# EAGLE board fmc (EAGLE 7.5.0)
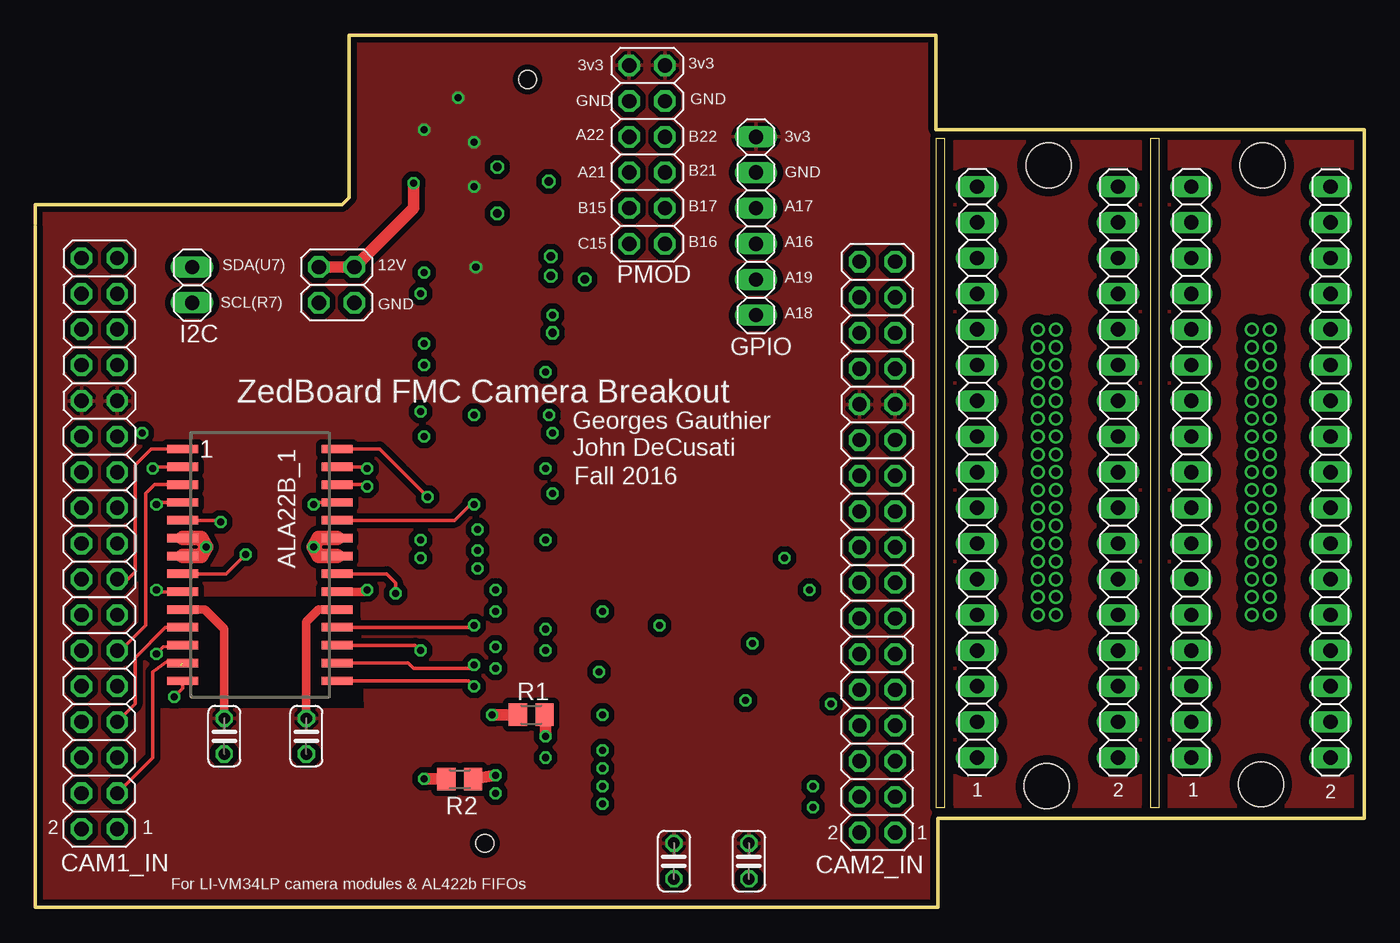
[diagram p0: board, top side]
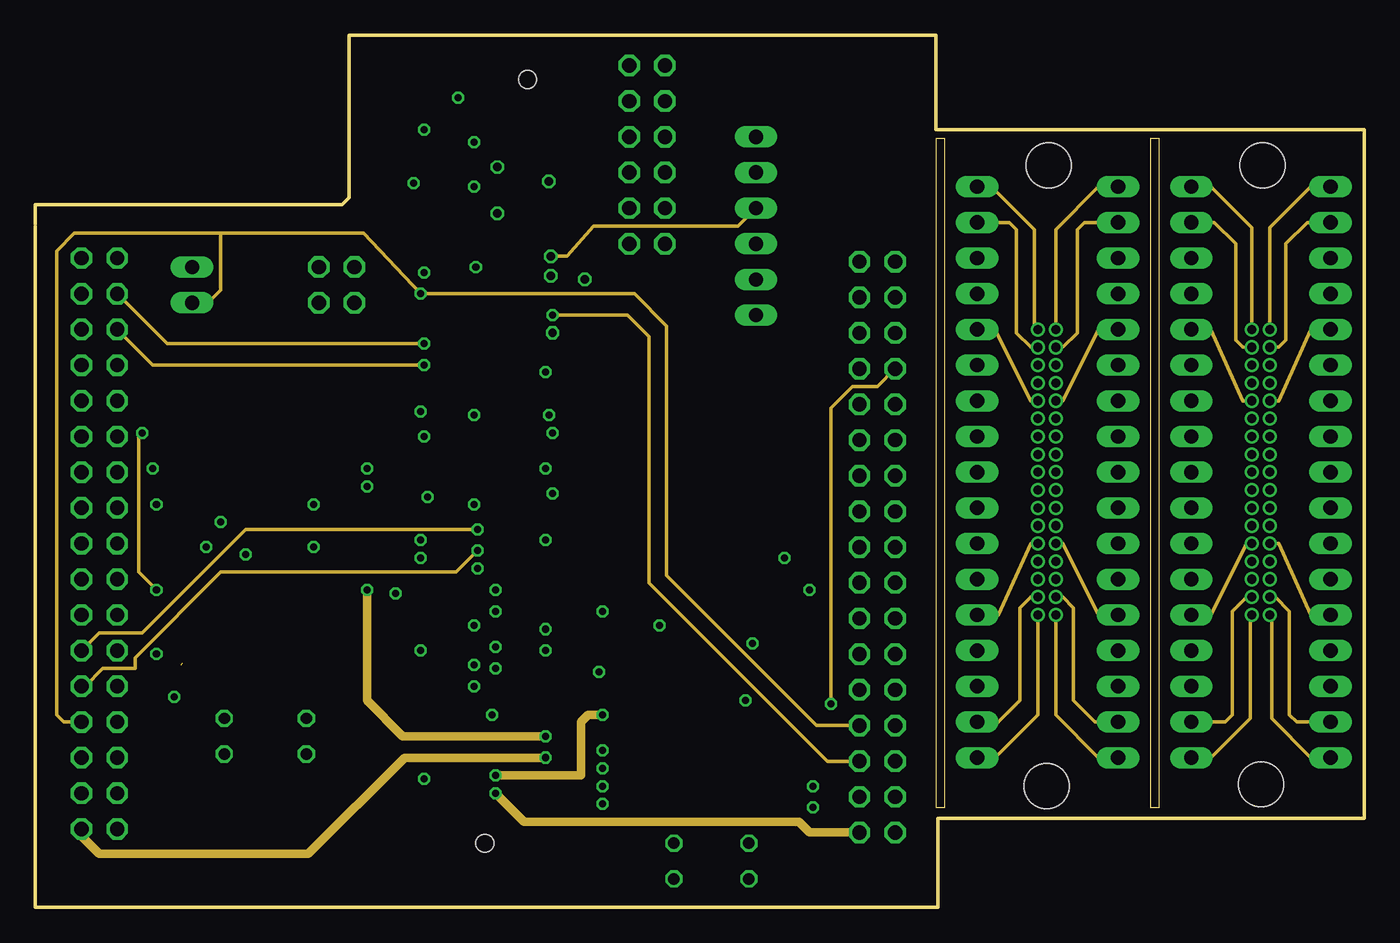
[diagram p1: board, inner layer Route2]
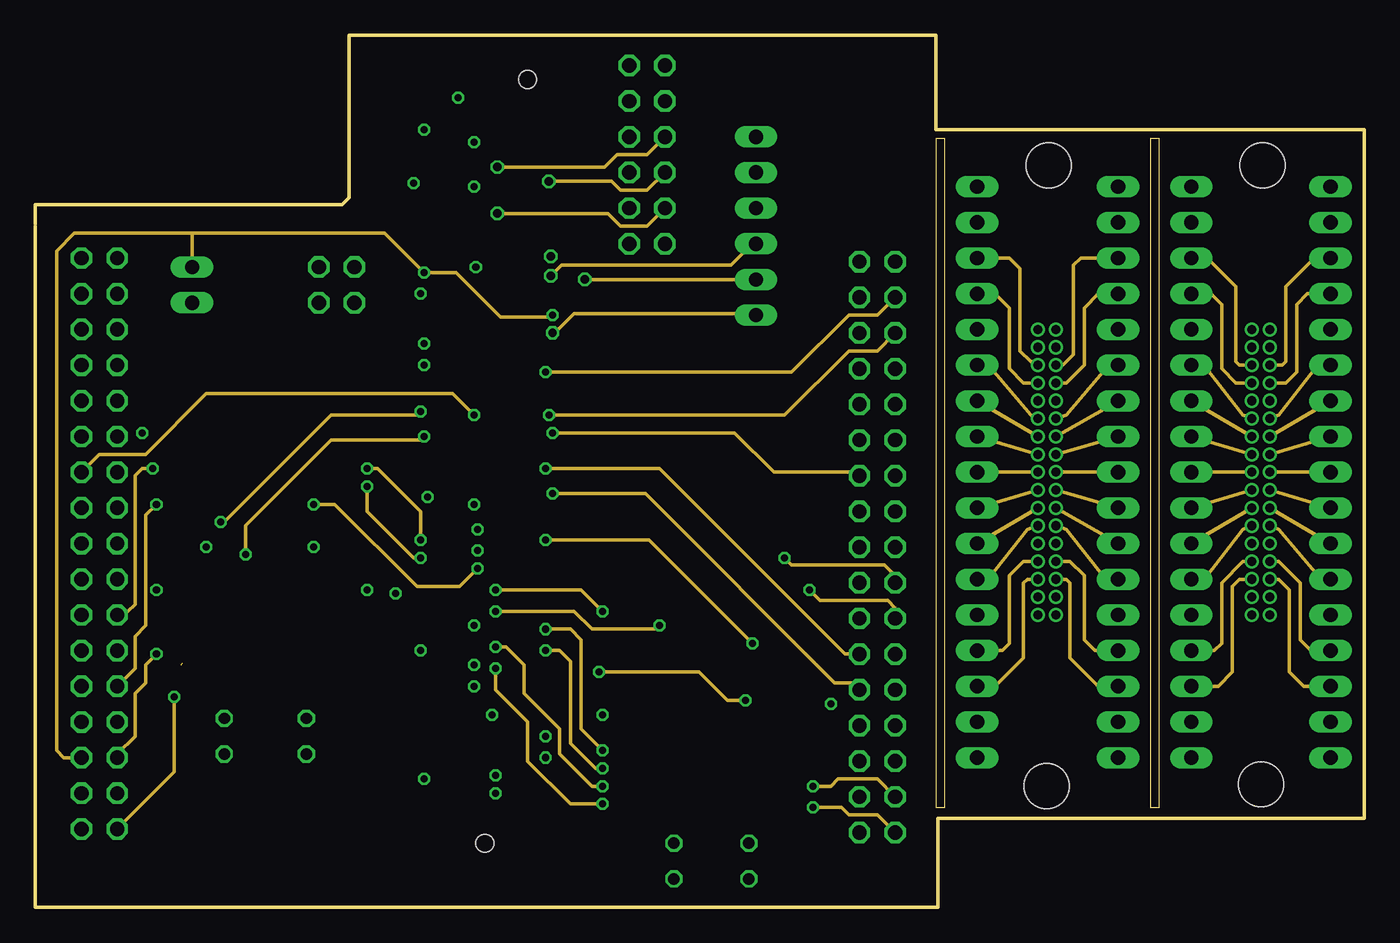
[diagram p2: board, inner layer Route15]
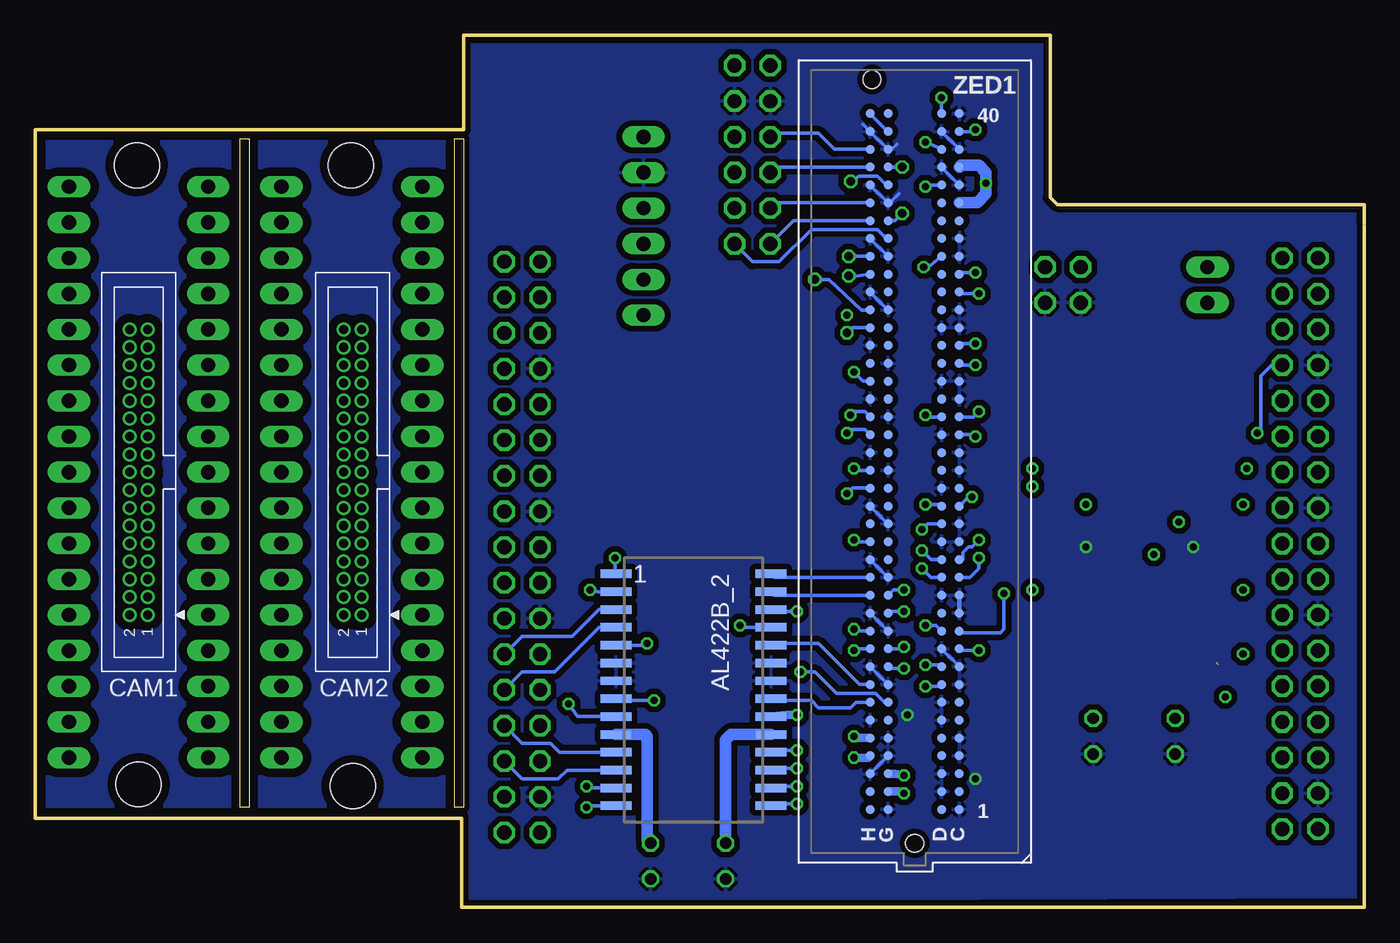
[diagram p3: board, bottom side, seen from below]

Size 94.61 x 62.1 mm. Coordinates in mm from the lower left corner, seen from the top.
Outline: 0,48.51 0,0 64.26,0 64.26,6.35 94.61,6.35 94.61,55.37 64.14,55.37 64.14,62.1 22.35,62.1 22.35,50.55 21.84,50.04 0,50.04 0,48.64
Copper layers (1*2+15*16): Top 0.0356mm / dielectric 1.5011mm / Route2 0.0356mm / dielectric 0.1499mm / Route15 0.0356mm / dielectric 0.2007mm / Bottom 0.0356mm
Design rules "OSHpark *": minimum track width 6mil, minimum drill 13mil, track to track 6mil, track to pad 6mil, pad to pad 6mil, via to via 6mil, smd to smd 6mil, copper to edge 15mil, drill to drill 6mil, minimum pad ring 7mil, minimum via ring 7mil, stop-mask expansion 3mil, vias tented up to drill 0mil, thermal gap 10mil
Holes 3.2 mm at 87.25,8.76 72.14,52.83 72.01,8.64 87.38,52.83

## Footprints (pad centres in the part's own frame; a part is rotated, then mirrored left to right if it is on the bottom)
SOP28 = smd 0.6 x 2.2: 1 -8.255,-5.5; 2 -6.985,-5.5; 3 -5.715,-5.5; 4 -4.445,-5.5; 5 -3.175,-5.5; 6 -1.905,-5.5; 7 -0.635,-5.5; 8 0.635,-5.5; 9 1.905,-5.5; 10 3.175,-5.5; 11 4.445,-5.5; 12 5.715,-5.5; 13 6.985,-5.5; 14 8.255,-5.5; 15 8.255,5.5; 16 6.985,5.5; 17 5.715,5.5; 18 4.445,5.5; 19 3.175,5.5; 20 1.905,5.5; 21 0.635,5.5; 22 -0.635,5.5; 23 -1.905,5.5; 24 -3.175,5.5; 25 -4.445,5.5; 26 -5.715,5.5; 27 -6.985,5.5; 28 -8.255,5.5
C025-024X044 = drill 0.813 octagon: 1 -1.27,0; 2 1.27,0
PHB_1MM27_2X17_SNT = drill 0.65: 1 -10.16,-0.635; 2 -10.16,0.635; 3 -8.89,-0.635; 4 -8.89,0.635; 5 -7.62,-0.635; 6 -7.62,0.635; 7 -6.35,-0.635; 8 -6.35,0.635; 9 -5.08,-0.635; 10 -5.08,0.635; 11 -3.81,-0.635; 12 -3.81,0.635; 13 -2.54,-0.635; 14 -2.54,0.635; 15 -1.27,-0.635; 16 -1.27,0.635; 17 0,-0.635; 18 0,0.635; 19 1.27,-0.635; 20 1.27,0.635; 21 2.54,-0.635; 22 2.54,0.635; 23 3.81,-0.635; 24 3.81,0.635; 25 5.08,-0.635; 26 5.08,0.635; 27 6.35,-0.635; 28 6.35,0.635; 29 7.62,-0.635; 30 7.62,0.635; 31 8.89,-0.635; 32 8.89,0.635; 33 10.16,-0.635; 34 10.16,0.635
2X17 = drill 1.016 octagon: 1 -20.32,-1.27; 2 -20.32,1.27; 3 -17.78,-1.27; 4 -17.78,1.27; 5 -15.24,-1.27; 6 -15.24,1.27; 7 -12.7,-1.27; 8 -12.7,1.27; 9 -10.16,-1.27; 10 -10.16,1.27; 11 -7.62,-1.27; 12 -7.62,1.27; 13 -5.08,-1.27; 14 -5.08,1.27; 15 -2.54,-1.27; 16 -2.54,1.27; 17 0,-1.27; 18 0,1.27; 19 2.54,-1.27; 20 2.54,1.27; 21 5.08,-1.27; 22 5.08,1.27; 23 7.62,-1.27; 24 7.62,1.27; 25 10.16,-1.27; 26 10.16,1.27; 27 12.7,-1.27; 28 12.7,1.27; 29 15.24,-1.27; 30 15.24,1.27; 31 17.78,-1.27; 32 17.78,1.27; 33 20.32,-1.27; 34 20.32,1.27
1X06 = drill 1.016 long: 1 -6.35,0; 2 -3.81,0; 3 -1.27,0; 4 1.27,0; 5 3.81,0; 6 6.35,0
1X02 = drill 1.016 long: 1 -1.27,0; 2 1.27,0
1X17 = drill 1.016 long: 1 -20.32,0; 2 -17.78,0; 3 -15.24,0; 4 -12.7,0; 5 -10.16,0; 6 -7.62,0; 7 -5.08,0; 8 -2.54,0; 9 0,0; 10 2.54,0; 11 5.08,0; 12 7.62,0; 13 10.16,0; 14 12.7,0; 15 15.24,0; 16 17.78,0; 17 20.32,0
2X06 = drill 1.016 octagon: 1 -6.35,-1.27; 2 -6.35,1.27; 3 -3.81,-1.27; 4 -3.81,1.27; 5 -1.27,-1.27; 6 -1.27,1.27; 7 1.27,-1.27; 8 1.27,1.27; 9 3.81,-1.27; 10 3.81,1.27; 11 6.35,-1.27; 12 6.35,1.27
2X02 = drill 1.016 octagon: 1 -1.27,-1.27; 2 -1.27,1.27; 3 1.27,-1.27; 4 1.27,1.27
M0805 = smd 1.3 x 1.6: 1 -0.95,0; 2 0.95,0
ASP-134604-01 = smd 0.635 x 0.635: C1 24.765,3.175; C2 23.495,3.175; C3 22.225,3.175; C4 20.955,3.175; C5 19.685,3.175; C6 18.415,3.175; C7 17.145,3.175; C8 15.875,3.175; C9 14.605,3.175; C10 13.335,3.175; C11 12.065,3.175; C12 10.795,3.175; C13 9.525,3.175; C14 8.255,3.175; C15 6.985,3.175; C16 5.715,3.175; C17 4.445,3.175; C18 3.175,3.175; C19 1.905,3.175; C20 0.635,3.175; C21 -0.635,3.175; C22 -1.905,3.175; C23 -3.175,3.175; C24 -4.445,3.175; C25 -5.715,3.175; C26 -6.985,3.175; C27 -8.255,3.175; C28 -9.525,3.175; C29 -10.795,3.175; C30 -12.065,3.175; C31 -13.335,3.175; C32 -14.605,3.175; C33 -15.875,3.175; C34 -17.145,3.175; C35 -18.415,3.175; C36 -19.685,3.175; C37 -20.955,3.175; C38 -22.225,3.175; C39 -23.495,3.175; C40 -24.765,3.175; D1 24.765,1.905; D2 23.495,1.905; D3 22.225,1.905; D4 20.955,1.905; D5 19.685,1.905; D6 18.415,1.905; D7 17.145,1.905; D8 15.875,1.905; D9 14.605,1.905; D10 13.335,1.905; D11 12.065,1.905; D12 10.795,1.905; D13 9.525,1.905; D14 8.255,1.905; D15 6.985,1.905; D16 5.715,1.905; D17 4.445,1.905; D18 3.175,1.905; D19 1.905,1.905; D20 0.635,1.905; D21 -0.635,1.905; D22 -1.905,1.905; D23 -3.175,1.905; D24 -4.445,1.905; D25 -5.715,1.905; D26 -6.985,1.905; D27 -8.255,1.905; D28 -9.525,1.905; D29 -10.795,1.905; D30 -12.065,1.905; D31 -13.335,1.905; D32 -14.605,1.905; D33 -15.875,1.905; D34 -17.145,1.905; D35 -18.415,1.905; D36 -19.685,1.905; D37 -20.955,1.905; D38 -22.225,1.905; D39 -23.495,1.905; D40 -24.765,1.905; G1 24.765,-1.905; G2 23.495,-1.905; G3 22.225,-1.905; G4 20.955,-1.905; G5 19.685,-1.905; G6 18.415,-1.905; G7 17.145,-1.905; G8 15.875,-1.905; G9 14.605,-1.905; G10 13.335,-1.905; G11 12.065,-1.905; G12 10.795,-1.905; G13 9.525,-1.905; G14 8.255,-1.905; G15 6.985,-1.905; G16 5.715,-1.905; G17 4.445,-1.905; G18 3.175,-1.905; G19 1.905,-1.905; G20 0.635,-1.905; G21 -0.635,-1.905; G22 -1.905,-1.905; G23 -3.175,-1.905; G24 -4.445,-1.905; G25 -5.715,-1.905; G26 -6.985,-1.905; G27 -8.255,-1.905; G28 -9.525,-1.905; G29 -10.795,-1.905; G30 -12.065,-1.905; G31 -13.335,-1.905; G32 -14.605,-1.905; G33 -15.875,-1.905; G34 -17.145,-1.905; G35 -18.415,-1.905; G36 -19.685,-1.905; G37 -20.955,-1.905; G38 -22.225,-1.905; G39 -23.495,-1.905; G40 -24.765,-1.905; H1 24.765,-3.175; H2 23.495,-3.175; H3 22.225,-3.175; H4 20.955,-3.175; H5 19.685,-3.175; H6 18.415,-3.175; H7 17.145,-3.175; H8 15.875,-3.175; H9 14.605,-3.175; H10 13.335,-3.175; H11 12.065,-3.175; H12 10.795,-3.175; H13 9.525,-3.175; H14 8.255,-3.175; H15 6.985,-3.175; H16 5.715,-3.175; H17 4.445,-3.175; H18 3.175,-3.175; H19 1.905,-3.175; H20 0.635,-3.175; H21 -0.635,-3.175; H22 -1.905,-3.175; H23 -3.175,-3.175; H24 -4.445,-3.175; H25 -5.715,-3.175; H26 -6.985,-3.175; H27 -8.255,-3.175; H28 -9.525,-3.175; H29 -10.795,-3.175; H30 -12.065,-3.175; H31 -13.335,-3.175; H32 -14.605,-3.175; H33 -15.875,-3.175; H34 -17.145,-3.175; H35 -18.415,-3.175; H36 -19.685,-3.175; H37 -20.955,-3.175; H38 -22.225,-3.175; H39 -23.495,-3.175; H40 -24.765,-3.175 | hole 1.27: 27.191,0; -27.191,-3.048

## Placement (x,y rotation side)
AL422B_2  CAM2_FIFO  [SOP28]  47.75,15.49 270 bottom
ALA22B_1  CAM1_FIFO  [SOP28]  16,24.38 270 top
C1  100nf  [C025-024X044]  19.3,12.19 270 top
C2  100nf  [C025-024X044]  13.46,12.19 270 top
C3  100nf  [C025-024X044]  45.47,3.3 270 top
C4  100nf  [C025-024X044]  50.8,3.3 270 top
CAM1  [PHB_1MM27_2X17_SNT]  87.25,30.99 90 bottom
CAM1_IN  [2X17]  4.57,25.91 90 top
CAM2  [PHB_1MM27_2X17_SNT]  72.01,30.99 90 bottom
CAM2_IN  [2X17]  59.94,25.65 90 top
GPIO  [1X06]  51.31,48.51 90 top
I2C  [1X02]  11.18,44.32 90 top
JP1  [1X17]  82.3,30.99 270 top
JP2  [1X17]  92.2,30.99 90 top
JP3  [1X17]  77.09,30.99 90 top
JP4  [1X17]  67.06,30.99 270 top
PMOD  [2X06]  43.56,53.59 270 top
PWR  PWR  [2X02]  21.46,44.32 270 top
R1  [M0805]  35.31,13.72 180 top
R2  [M0805]  30.23,9.14 180 top
ZED1  ZED-BOARD  [ASP-134604-01]  32,31.75 270 bottom

## Library data of the parts
AL422B_2 ALA22B_1 = AL422B
C1-C4 = rcl
CAM1 CAM2 = _hhn_con_pinhead_box_1mm27
CAM1_IN CAM2_IN GPIO I2C JP1-JP4 PMOD PWR = pinhead
R1 R2 = resistor
ZED1 = zed-board

## Nets
3V3: AL422B_2.10 AL422B_2.19 ALA22B_1.10 ALA22B_1.19 C1.1 C2.1 C3.1 C4.1 CAM1_IN.25 CAM1_IN.26 CAM2_IN.25 CAM2_IN.26 GPIO.6 PMOD.1 PMOD.2 ZED1.C39 ZED1.D32 ZED1.D36 ZED1.D38 ZED1.D40
12V: PWR.1 PWR.2 ZED1.C35 ZED1.C37
A16: GPIO.3 ZED1.H31
A17: GPIO.4 ZED1.H32
A18: GPIO.1 ZED1.H28
A19: GPIO.2 ZED1.H29
A21: PMOD.7 ZED1.H37
A22: PMOD.5 ZED1.H38
B15: PMOD.9 ZED1.H35
B16: PMOD.12 ZED1.G33
B17: PMOD.10 ZED1.G34
B19: ZED1.D20
B20: ZED1.D21
B21: PMOD.8 ZED1.G36
B22: PMOD.6 ZED1.G37
C1D2: ALA22B_1.1 CAM1_IN.15
C1D3: ALA22B_1.2 CAM1_IN.13
C1D4: ALA22B_1.3 CAM1_IN.11
C1D5: ALA22B_1.4 CAM1_IN.9
C1D6: ALA22B_1.11 CAM1_IN.7
C1D7: ALA22B_1.12 CAM1_IN.5
C1D8: ALA22B_1.13 CAM1_IN.3
C1D9: ALA22B_1.14 CAM1_IN.1
C2D2: AL422B_2.1 CAM2_IN.15
C2D3: AL422B_2.2 CAM2_IN.13
C2D4: AL422B_2.3 CAM2_IN.11
C2D5: AL422B_2.4 CAM2_IN.9
C2D6: AL422B_2.11 CAM2_IN.7
C2D7: AL422B_2.12 CAM2_IN.5
C2D8: AL422B_2.13 CAM2_IN.3
C2D9: AL422B_2.14 CAM2_IN.1
C15: PMOD.11 ZED1.H34
C17: ZED1.G30
C18: ZED1.G31
C20: ALA22B_1.5 ZED1.C23
C22: ZED1.G28
CLK0_N(L19): ALA22B_1.20 R1.1 ZED1.H5
CLK0_P(L18): CAM1_IN.2 ZED1.H4
CLK1_N(C19): AL422B_2.20 R2.1 ZED1.G3
CLK1_P(D18): CAM2_IN.2 ZED1.G2
D15: ZED1.D24
D20: ALA22B_1.8 ZED1.C22
D21: CAM1_IN.31 ZED1.C27
D22: ZED1.G27
DP0-C2M_N: ZED1.C3
DP0-C2M_P: ZED1.C2
DP0-M2C_N: ZED1.C7
DP0-M2C_P: ZED1.C6
E15: CAM1_IN.22 ZED1.D23
E18: ZED1.D27
E19: CAM2_IN.31 ZED1.H25
E20: ZED1.H26
E21: CAM1_IN.29 ZED1.C26
F18: ZED1.D26
F19: ZED1.G25
FMC-PRSNT(AB14): ZED1.H2
FMC-VREF: ZED1.H1
G15: CAM2_IN.22 ZED1.H22
G16: CAM2_IN.29 ZED1.H23
G19: ZED1.G24
G20: ZED1.G21
G21: ZED1.G22
GA0: ZED1.C34
GA1: ZED1.D35
GBTCLK0-M2C_N: ZED1.D5
GBTCLK0-M2C_P: ZED1.D4
GND: AL422B_2.6 AL422B_2.7 AL422B_2.22 AL422B_2.23 ALA22B_1.6 ALA22B_1.7 ALA22B_1.22 ALA22B_1.23 C1.2 C2.2 C3.2 C4.2 CAM1_IN.4 CAM1_IN.14 CAM1_IN.20 CAM1_IN.28 CAM2_IN.4 CAM2_IN.14 CAM2_IN.20 CAM2_IN.28 GPIO.5 PMOD.3 PMOD.4 PWR.3 PWR.4 R1.2 R2.2 ZED1.C1 ZED1.C4 ZED1.C5 ZED1.C8 ZED1.C9 ZED1.C12 ZED1.C13 ZED1.C16 ZED1.C17 ZED1.C20 ZED1.C21 ZED1.C24 ZED1.C25 ZED1.C28 ZED1.C29 ZED1.C32 ZED1.C33 ZED1.C36 ZED1.C38 ZED1.C40 ZED1.D2 ZED1.D3 ZED1.D6 ZED1.D7 ZED1.D10 ZED1.D13 ZED1.D16 ZED1.D19 ZED1.D22 ZED1.D25 ZED1.D28 ZED1.D37 ZED1.D39 ZED1.G1 ZED1.G4 ZED1.G5 ZED1.G8 ZED1.G11 ZED1.G14 ZED1.G17 ZED1.G20 ZED1.G23 ZED1.G26 ZED1.G29 ZED1.G32 ZED1.G35 ZED1.G38 ZED1.H3 ZED1.H6 ZED1.H9 ZED1.H12 ZED1.H15 ZED1.H18 ZED1.H21 ZED1.H24 ZED1.H27 ZED1.H30 ZED1.H33 ZED1.H36 ZED1.H39
J16: CAM2_IN.10 ZED1.H19
J17: CAM2_IN.12 ZED1.H20
J18: ALA22B_1.18 ZED1.D11
J20: ZED1.G18
J21: AL422B_2.25 ZED1.G12
J22: AL422B_2.26 ZED1.G13
K18: ZED1.D12
K19: ALA22B_1.28 ZED1.C18
K20: ZED1.C19
K21: ZED1.G19
L17: CAM1_IN.12 ZED1.D17
L21: ALA22B_1.17 ZED1.C10
L22: ALA22B_1.21 ZED1.C11
M17: ALA22B_1.24 ZED1.D18
M19: ZED1.G6
M20: AL422B_2.8 ZED1.G7
M21: AL422B_2.17 ZED1.H10
M22: AL422B_2.18 ZED1.H11
N17: AL422B_2.5 ZED1.H16
N18: ZED1.H17
N19: ALA22B_1.15 ZED1.D8
N20: ALA22B_1.16 ZED1.D9
N22: AL422B_2.15 ZED1.G9
N$1: CAM1.34 JP2.17
N$2: CAM1.32 JP2.16
N$3: CAM1.30 JP2.15
N$4: CAM1.28 JP2.14
N$5: CAM1.26 JP2.13
N$6: CAM1.24 JP2.12
N$7: CAM1.22 JP2.11
N$8: CAM1.20 JP2.10
N$9: CAM1.18 JP2.9
N$10: CAM1.16 JP2.8
N$11: CAM1.14 JP2.7
N$12: CAM1.12 JP2.6
N$13: CAM1.10 JP2.5
N$14: CAM1.8 JP2.4
N$15: CAM1.6 JP2.3
N$16: CAM1.4 JP2.2
N$17: CAM1.2 JP2.1
N$18: CAM1.33 JP1.1
N$19: CAM1.31 JP1.2
N$21: CAM1.29 JP1.3
N$22: CAM1.27 JP1.4
N$23: CAM1.25 JP1.5
N$24: CAM1.23 JP1.6
N$25: CAM1.21 JP1.7
N$26: CAM1.19 JP1.8
N$27: CAM1.17 JP1.9
N$28: CAM1.15 JP1.10
N$29: CAM1.13 JP1.11
N$30: CAM1.11 JP1.12
N$31: CAM1.9 JP1.13
N$32: CAM1.7 JP1.14
N$33: CAM1.5 JP1.15
N$34: CAM1.3 JP1.16
N$35: CAM1.1 JP1.17
N$36: CAM2.33 JP4.1
N$37: CAM2.31 JP4.2
N$38: CAM2.29 JP4.3
N$39: CAM2.27 JP4.4
N$40: CAM2.25 JP4.5
N$41: CAM2.23 JP4.6
N$42: CAM2.21 JP4.7
N$43: CAM2.19 JP4.8
N$44: CAM2.17 JP4.9
N$45: CAM2.15 JP4.10
N$46: CAM2.13 JP4.11
N$47: CAM2.11 JP4.12
N$48: CAM2.9 JP4.13
N$49: CAM2.7 JP4.14
N$50: CAM2.5 JP4.15
N$51: CAM2.3 JP4.16
N$52: CAM2.1 JP4.17
N$53: CAM2.34 JP3.17
N$54: CAM2.32 JP3.16
N$55: CAM2.30 JP3.15
N$56: CAM2.28 JP3.14
N$57: CAM2.26 JP3.13
N$58: CAM2.24 JP3.12
N$59: CAM2.22 JP3.11
N$60: CAM2.20 JP3.10
N$61: CAM2.18 JP3.9
N$62: CAM2.16 JP3.8
N$63: CAM2.14 JP3.7
N$64: CAM2.12 JP3.6
N$65: CAM2.10 JP3.5
N$66: CAM2.8 JP3.4
N$67: CAM2.6 JP3.3
N$68: CAM2.4 JP3.2
N$69: CAM2.2 JP3.1
N$94: CAM1_IN.19
N$95: CAM1_IN.17
N$128: CAM2_IN.19
N$129: CAM2_IN.17
P17: AL422B_2.21 ZED1.H7
P18: AL422B_2.24 ZED1.H8
P20: ZED1.G15
P21: ZED1.G16
P22: AL422B_2.16 ZED1.G10
PS-POR-B: ZED1.D1
R19: ALA22B_1.26 ZED1.C14
R20: ALA22B_1.25 ZED1.D14
R21: CAM1_IN.10 ZED1.D15
SCL(R7): CAM1_IN.8 CAM2_IN.8 I2C.1 ZED1.C30
SDA(U7): CAM1_IN.6 CAM2_IN.6 I2C.2 ZED1.C31
SHIELD: ZED1.G40
T16: AL422B_2.27 ZED1.H13
T17: AL422B_2.28 ZED1.H14
T19: ALA22B_1.27 ZED1.C15
TCK: ZED1.D29
TDI: ZED1.D30
TDO: ZED1.D31
TMS: ZED1.D33
TRST_L: ZED1.D34
VADJ: ZED1.G39 ZED1.H40
WCK1: ALA22B_1.9 CAM1_IN.27
WCK2: AL422B_2.9 CAM2_IN.27

## Tracks (layer width: path | path; a pad name or v marks a point on that pad's centre or on a via)
3V3  (via drill 0.5)
  Top 0.61: ALA22B_1.10 12.06,21.21 13.46,19.81 C2.1 | ALA22B_1.19 20.19,21.21 19.3,20.32 C1.1
  Bottom 0.254: ZED1.D32 30.86,45.72 v31.37,45.59 | ZED1.D40 v30.1,57.66 | ZED1.D38 30.86,54.36 v31.24,54.48 | ZED1.D36 31.11,51.44 v31.24,51.31 | ZED1.C39 27.81,55.25 v27.69,55.37
  Bottom 0.813: AL422B_2.19 45.09,12.32 45.47,11.94 C3.1 | AL422B_2.10 51.18,12.32 51.05,12.19 51.05,4.83 C4.1
  pour Top (isolate 0.406, rank 6): 22.35,62.1 22.35,49.91 21.84,50.04 0.13,50.16 0.13,0.51 64.26,0.64 64.26,61.98 22.48,62.1
12V  (via drill 0.5)
  Top 0.813: PWR.1 PWR.2 26.92,49.78 v26.92,51.56
  Bottom 0.813: ZED1.C35 27.56,50.16 26.92,50.8 v26.92,51.56 26.92,52.32 27.43,52.83 28.7,52.83 ZED1.C37
A16  (via drill 0.6)
  Route15 0.254: v36.7,44.96 37.46,45.72 49.53,45.72 51.18,47.37 GPIO.3
  Bottom 0.254: ZED1.H31 36.2,44.96 v36.7,44.96
A17  (via drill 0.6)
  Route2 0.254: v36.7,46.36 37.85,46.36 39.75,48.51 50.04,48.51 GPIO.4
  Bottom 0.254: ZED1.H32 v36.7,46.36
A18  (via drill 0.6)
  Route15 0.254: v36.83,40.89 36.96,40.89 38.35,42.29 51.18,42.29 GPIO.1
  Bottom 0.254: ZED1.H28 36.45,41.27 v36.83,40.89
A19  (via drill 0.6)
  Route15 0.254: v39.12,44.7 GPIO.2
  Bottom 0.254: ZED1.H29 35.81,42.55 38.1,44.7 v39.12,44.7
A21
  Bottom 0.254: ZED1.H37 41.91,52.7 PMOD.7
A22
  Bottom 0.254: ZED1.H38 37.72,53.98 38.86,55.12 42.04,55.12 PMOD.5
B15
  Bottom 0.254: ZED1.H35 41.91,50.16 PMOD.9
B16
  Bottom 0.254: ZED1.G33 34.04,47.62 34.67,48.26 39.37,48.26 41.66,45.97 43.56,45.97 PMOD.12
B17  (via drill 0.6)
  Route15 0.254: v32.89,49.4 40.77,49.4 41.66,48.51 43.56,48.51 PMOD.10
  Bottom 0.254: ZED1.G34 33.4,48.9 v32.89,49.4
B21  (via drill 0.6)
  Route15 0.254: v36.58,51.69 41.02,51.69 41.66,51.05 43.56,51.05 PMOD.8
  Bottom 0.254: ZED1.G36 34.04,51.44 34.67,52.07 35.94,52.07 v36.58,51.69
B22  (via drill 0.6)
  Route15 0.254: v32.89,52.7 40.51,52.7 41.4,53.59 43.56,53.59 PMOD.6
  Bottom 0.254: ZED1.G37 v32.89,52.7
C1D2
  Top 0.254: ALA22B_1.1 8.26,32.64 7.11,31.5 7.11,23.88 6.6,23.37 CAM1_IN.15
C1D3  (via drill 0.5)
  Top 0.254: ALA22B_1.2 8.51,31.37 v8.38,31.24
  Route15 0.254: v8.38,31.24 7.62,31.24 7.11,30.73 7.11,21.59 6.6,21.08 6.1,21.08 CAM1_IN.13
C1D4
  Top 0.254: ALA22B_1.3 8.51,30.1 7.87,29.46 7.87,20.07 6.35,18.54 CAM1_IN.11
C1D5  (via drill 0.5)
  Top 0.254: ALA22B_1.4 8.76,28.83 v8.64,28.7
  Route15 0.254: v8.64,28.7 7.87,27.94 7.87,20.07 7.11,19.3 7.11,17.02 CAM1_IN.9
C1D6
  Top 0.254: ALA22B_1.11 9.27,19.94 7.11,17.78 7.11,14.48 CAM1_IN.7
C1D7  (via drill 0.5)
  Top 0.254: v8.64,18.03 9.11,18.54 ALA22B_1.12
  Route15 0.254: CAM1_IN.5 5.84,10.92 7.11,12.19 7.11,15.24 7.87,16 7.87,17.27 v8.64,18.03
C1D8  (1 unrouted)
  Top 0.254: CAM1_IN.3 8.38,10.67 8.38,16.76 9.4,17.53 10.16,17.53 10.41,17.27 10.41,17.53
C1D9  (via drill 0.5)
  Top 0.254: ALA22B_1.14 10.5,15.58 v9.91,14.99
  Route15 0.254: v9.91,14.99 9.91,9.65 CAM1_IN.1
C2D2  (via drill 0.5)
  Route15 0.254: CAM2_IN.15 61.21,23.62 60.45,24.38 53.85,24.38 v53.34,24.89
  Bottom 0.254: v53.34,24.89 53.34,23.84 AL422B_2.1
C2D3  (via drill 0.5)
  Route15 0.254: CAM2_IN.13 61.21,21.34 60.71,21.84 55.88,21.84 v55.12,22.61
  Bottom 0.254: AL422B_2.2 54.48,22.48 v55.12,22.61
C2D4
  Bottom 0.254: AL422B_2.3 54.48,21.21 56.39,19.3 59.94,19.3 CAM2_IN.11
C2D5
  Bottom 0.254: AL422B_2.4 54.48,19.94 57.66,16.76 59.94,16.76 CAM2_IN.9
C2D6
  Bottom 0.254: AL422B_2.11 57.28,11.05 57.91,11.68 59.94,11.68 CAM2_IN.7
C2D7
  Bottom 0.254: AL422B_2.12 56.77,9.78 57.4,9.14 59.94,9.14 CAM2_IN.5
C2D8  (via drill 0.5)
  Route15 0.254: v55.37,8.64 56.64,8.64 57.15,9.14 59.94,9.14 CAM2_IN.3
  Bottom 0.254: AL422B_2.13 55.24,8.51 v55.37,8.64
C2D9  (via drill 0.5)
  Route15 0.254: v55.37,7.11 57.4,7.11 57.91,6.6 59.94,6.6 CAM2_IN.1
  Bottom 0.254: AL422B_2.14 55.24,7.24 v55.37,7.11
C15
  Bottom 0.254: ZED1.H34 40.64,48.9 PMOD.11
C20  (via drill 0.5)
  Top 0.254: ALA22B_1.5 13.08,27.56 v13.21,27.43
  Route15 0.254: v13.21,27.43 13.46,27.43 21.08,35.05 27.18,35.05 v27.43,35.31
  Bottom 0.254: ZED1.C23 27.81,34.93 v27.43,35.31
CLK0_N(L19)  (via drill 0.5)
  Top 0.61: ALA22B_1.20 23.49,22.48 v23.62,22.61
  Top 0.813: v36.32,12.19 36.32,13.65 R1.1
  Route2 0.61: v36.32,12.19 26.16,12.19 23.62,14.73 v23.62,22.61
  Bottom 0.61: ZED1.H5 36.2,12.07 v36.32,12.19
CLK0_P(L18)  (via drill 0.5)
  Route2 0.61: CAM1_IN.2 3.3,5.08 4.57,3.81 19.43,3.81 26.29,10.67 v36.32,10.67
  Bottom 0.61: v36.32,10.67 35.31,10.67 ZED1.H4
CLK1_N(C19)  (via drill 0.5)
  Top 0.813: R2.1 v32.77,9.4
  Route2 0.61: v32.77,9.4 38.86,9.4 38.86,13.21 39.37,13.72 v40.39,13.72
  Bottom 0.61: ZED1.G3 33.4,9.53 v32.77,9.4 | v40.39,13.72 41.11,13.72 AL422B_2.20
CLK1_P(D18)  (via drill 0.5)
  Route2 0.61: v32.77,8.13 34.8,6.1 54.36,6.1 55.12,5.33 CAM2_IN.2
  Bottom 0.61: ZED1.G2 33.15,8.25 v32.77,8.13
D20  (via drill 0.5)
  Top 0.254: ALA22B_1.8 13.59,23.75 v14.99,25.15
  Route15 0.254: v14.99,25.15 14.99,27.18 21.08,33.27 27.43,33.27 v27.69,33.53
  Bottom 0.254: ZED1.C22 27.81,33.66 v27.69,33.53
D21  (via drill 0.5)
  Route2 0.254: v27.69,40.13 27.18,40.13 26.92,40.13 9.4,40.13 CAM1_IN.31
  Bottom 0.254: v27.69,40.13 28.7,40.13 ZED1.C27
E15  (via drill 0.5)
  Route15 0.254: CAM1_IN.22 4.57,32.26 7.87,32.26 12.19,36.58 29.72,36.58 v31.24,35.05
  Bottom 0.254: ZED1.D23 31.11,34.93 v31.24,35.05
E19  (via drill 0.5)
  Route15 0.254: v36.32,38.1 53.85,38.1 57.91,42.16 59.94,42.16 CAM2_IN.31
  Bottom 0.254: ZED1.H25 35.69,37.47 v36.32,38.1
E21  (via drill 0.5)
  Route2 0.254: CAM1_IN.29 8.38,38.61 v27.69,38.61
  Bottom 0.254: v27.69,38.61 28.7,38.61 ZED1.C26
G15  (via drill 0.5)
  Route15 0.254: v36.83,33.78 49.78,33.78 52.58,30.99 58.42,30.99 CAM2_IN.22
  Bottom 0.254: ZED1.H22 35.56,34.04 36.58,34.04 v36.83,33.78
G16  (via drill 0.5)
  Route15 0.254: v36.58,35.05 53.34,35.05 57.91,39.62 59.94,39.62 CAM2_IN.29
  Bottom 0.254: ZED1.H23 35.56,35.31 36.32,35.31 v36.58,35.05
GND  (via drill 0.5)
  Top 0.254: 21.5,24.89 ALA22B_1.22
  Top 0.813: R1.2 v32.51,13.72 | R2.2 v27.69,9.14
  Top 1.016: ALA22B_1.6 11.81,26.29 v12.19,25.65 11.81,25.02 ALA22B_1.7 | ALA22B_1.23 20.19,26.29 v19.81,25.65 20.19,25.02 ALA22B_1.22
  Bottom 0.254: ZED1.G4 ZED1.H3 | ZED1.G8 ZED1.H9 | ZED1.G11 ZED1.H12 | ZED1.G14 ZED1.H15 | ZED1.H18 ZED1.G17 | ZED1.C9 ZED1.D10 | 33.27,54.36 33.66,53.98 ZED1.G38 ZED1.H39 35.69,55.75 | ZED1.C38 ZED1.D39 | ZED1.C36 ZED1.D37 | ZED1.H36 ZED1.G35 33.78,50.16 33.15,50.8 | ZED1.G32 ZED1.H33 | ZED1.G29 ZED1.H30
  Bottom 0.305: ZED1.C13 ZED1.C12
  pour Bottom (isolate 0.406): -0.13,50.04 0.13,0.76 64.01,0.51 64.14,61.85 22.48,61.98 22.73,50.04
J16  (via drill 0.5)
  Route15 0.254: v36.83,29.46 43.43,29.46 56.9,16 58.17,16 CAM2_IN.10
  Bottom 0.254: ZED1.H19 36.45,29.84 v36.83,29.46
J17  (via drill 0.5)
  Route15 0.254: v36.32,31.24 44.45,31.24 57.66,18.03 CAM2_IN.12
  Bottom 0.254: ZED1.H20 36.2,31.12 v36.32,31.24
J18  (via drill 0.5)
  Top 0.254: ALA22B_1.18 31.11,19.94 v31.24,20.07
  Bottom 0.254: v31.24,20.07 30.48,20.07 ZED1.D11
J21  (via drill 0.5)
  Route15 0.254: v32.77,21.08 38.35,21.08 39.62,19.81 44.2,19.81 v44.45,20.07
  Bottom 0.254: v32.77,21.08 33.78,21.08 ZED1.G12 | AL422B_2.25 44.32,19.94 v44.45,20.07
J22  (via drill 0.5)
  Route15 0.254: v32.77,22.61 38.86,22.61 v40.39,21.08
  Bottom 0.254: v32.77,22.61 33.53,22.61 ZED1.G13 | v40.39,21.08 42.12,21.08 AL422B_2.26
K19  (via drill 0.5)
  Top 0.254: ALA22B_1.28 24.51,32.64 v27.94,29.21
  Bottom 0.254: v27.94,29.21 28.19,29.21 ZED1.C18
L17  (via drill 0.5)
  Route2 0.254: CAM1_IN.12 4.57,19.56 7.62,19.56 14.99,26.92 v31.5,26.92
  Bottom 0.254: ZED1.D17 31.11,27.3 v31.5,26.92
L21  (via drill 0.5)
  Top 0.254: ALA22B_1.17 27.05,18.67 v27.43,18.29
  Bottom 0.254: v27.43,18.29 28.7,18.29 ZED1.C10
L22  (via drill 0.5)
  Top 0.254: ALA22B_1.21 25.02,23.75 25.65,23.11 v25.65,22.35
  Bottom 0.254: v25.65,22.35 25.65,19.81 25.91,19.56 28.7,19.56 ZED1.C11
M17  (via drill 0.5)
  Top 0.254: ALA22B_1.24 29.84,27.56 30.99,28.7 v31.24,28.7
  Bottom 0.254: v31.24,28.7 30.23,28.7 ZED1.D18
M20  (via drill 0.5)
  Route15 0.254: v40.13,16.76 47.24,16.76 49.28,14.73 v50.55,14.73
  Bottom 0.254: ZED1.G7 34.16,14.61 34.8,15.24 37.59,15.24 39.12,16.76 v40.13,16.76 | v50.55,14.73 53.12,14.73 AL422B_2.8
M21  (via drill 0.5)
  Route15 0.254: v36.32,18.29 37.34,18.29 38.1,17.53 38.1,11.68 39.88,9.91 v40.39,9.91
  Bottom 0.254: ZED1.H10 36.2,18.42 v36.32,18.29 | v40.39,9.91 42.12,9.91 AL422B_2.17
M22  (via drill 0.5)
  Route15 0.254: v36.32,19.81 38.1,19.81 38.86,19.05 38.86,12.7 v40.39,11.18
  Bottom 0.254: ZED1.H11 36.2,19.69 v36.32,19.81 | v40.39,11.18 42.12,11.18 AL422B_2.18
N17  (via drill 0.5)
  Route15 0.254: v36.32,26.16 43.69,26.16 v51.05,18.8
  Bottom 0.254: ZED1.H16 36.2,26.04 v36.32,26.16 | AL422B_2.5 51.18,18.67 v51.05,18.8
N19  (via drill 0.5)
  Top 0.254: ALA22B_1.15 30.86,16.13 v31.24,15.75
  Bottom 0.254: v31.24,15.75 30.23,15.75 ZED1.D8
N20  (via drill 0.5)
  Top 0.254: ALA22B_1.16 26.54,17.4 26.92,17.02 30.99,17.02 v31.24,17.27
  Bottom 0.254: v31.24,17.27 30.23,17.27 ZED1.D9
N22  (via drill 0.5)
  Route15 0.254: v32.77,17.02 32.77,15.49 35.05,13.21 35.05,10.41 38.1,7.37 v40.39,7.37
  Bottom 0.254: v32.77,17.02 33.78,17.02 ZED1.G9 | v40.39,7.37 42.12,7.37 AL422B_2.15
N$1
  Route2 0.254: 92.33,51.31 JP2.17 90.8,51.31 87.88,48.39 CAM1.34
N$2
  Route2 0.254: JP2.16 90.55,48.77 89.03,47.24 89.03,40.39 88.52,39.88 CAM1.32
N$3
  Route15 0.254: CAM1.30 88.77,38.61 89.03,38.86 89.03,44.2 91.06,46.23 JP2.15
N$4
  Route15 0.254: CAM1.28 89.03,37.34 89.79,38.1 89.79,42.93 90.55,43.69 JP2.14
N$5
  Route2 0.254: CAM1.26 88.52,36.07 90.8,41.15 JP2.13
N$6
  Route15 0.254: CAM1.24 88.52,35.05 91.31,38.61 JP2.12
N$7
  Route15 0.254: CAM1.22 JP2.11
N$8
  Route15 0.254: CAM1.20 JP2.10
N$9
  Route15 0.254: CAM1.18 JP2.9
N$10
  Route15 0.254: CAM1.16 JP2.8
N$11
  Route15 0.254: CAM1.14 JP2.7
N$12
  Route15 0.254: CAM1.12 88.52,26.92 91.31,23.62 JP2.6
N$13
  Route2 0.254: CAM1.10 88.52,25.91 90.8,20.83 JP2.5
N$14
  Route15 0.254: CAM1.8 88.52,24.64 90.04,23.11 90.04,19.05 90.8,18.29 JP2.4
N$15
  Route15 0.254: JP2.3 90.3,15.75 89.28,16.76 89.28,22.61 88.52,23.37 CAM1.6
N$16
  Route2 0.254: CAM1.4 88.27,22.1 89.28,21.08 89.28,13.72 89.79,13.21 JP2.2
N$17
  Route2 0.254: JP2.1 90.8,10.67 88.01,13.46 88.01,20.7 CAM1.2
N$18
  Route2 0.254: CAM1.33 86.61,48.39 83.44,51.56 82.55,51.56 JP1.1
N$19
  Route2 0.254: CAM1.31 85.98,39.88 85.47,40.39 85.47,47.24 83.95,48.77 JP1.2 81.66,48.77
N$21
  Route15 0.254: CAM1.29 85.72,38.61 85.47,38.86 85.47,44.2 83.69,45.97 82.55,45.97 JP1.3
N$22
  Route15 0.254: CAM1.27 85.47,37.34 84.45,38.35 84.45,42.93 83.69,43.69 JP1.4
N$23
  Route2 0.254: CAM1.25 85.98,36.07 83.69,41.15 JP1.5
N$24
  Route15 0.254: CAM1.23 85.98,35.05 83.19,38.61 JP1.6
N$25
  Route15 0.254: JP1.7 CAM1.21
N$26
  Route15 0.254: JP1.8 CAM1.19
N$27
  Route15 0.254: CAM1.17 JP1.9
N$28
  Route15 0.254: CAM1.15 JP1.10
N$29
  Route15 0.254: CAM1.13 JP1.11
N$30
  Route15 0.254: CAM1.11 85.98,26.92 83.44,23.62 JP1.12
N$31
  Route2 0.254: CAM1.9 86.23,25.91 83.69,20.83 JP1.13
N$32
  Route15 0.254: CAM1.7 85.98,24.64 84.45,23.11 84.45,18.8 83.95,18.29 JP1.14
N$33
  Route15 0.254: CAM1.5 85.72,23.37 85.22,22.86 85.22,16.76 84.2,15.75 JP1.15
N$34
  Route2 0.254: CAM1.3 86.23,22.1 85.22,21.08 85.22,13.72 84.71,13.21 JP1.16
N$35
  Route2 0.254: JP1.17 83.69,10.67 86.49,13.46 86.49,20.7 CAM1.1
N$36
  Route2 0.254: JP4.1 68.07,51.31 71.12,48.26 71.12,41.4 CAM2.33
N$37
  Route2 0.254: JP4.2 69.34,48.77 69.85,48.26 69.85,40.89 70.87,39.88 CAM2.31
N$38
  Route15 0.254: JP4.3 69.34,46.23 70.1,45.47 70.1,39.62 70.87,38.86 71.12,38.86 CAM2.29
N$39
  Route15 0.254: JP4.4 68.33,43.69 69.34,42.67 69.34,38.35 70.36,37.34 CAM2.27
N$40
  Route2 0.254: CAM2.25 70.87,36.07 68.33,41.15 JP4.5
N$41
  Route15 0.254: CAM2.23 70.87,35.05 68.07,38.35 JP4.6
N$42
  Route15 0.254: JP4.7 CAM2.21
N$43
  Route15 0.254: JP4.8 CAM2.19
N$44
  Route15 0.254: CAM2.17 JP4.9
N$45
  Route15 0.254: CAM2.15 JP4.10
N$46
  Route15 0.254: CAM2.13 JP4.11
N$47
  Route15 0.254: CAM2.11 70.61,26.92 67.82,23.37 JP4.12
N$48
  Route2 0.254: CAM2.9 70.87,25.91 68.58,20.83 JP4.13
N$49
  Route15 0.254: CAM2.7 70.36,24.64 69.34,23.62 69.34,18.8 68.83,18.29 JP4.14
N$50
  Route15 0.254: JP4.15 68.33,15.75 70.36,17.78 70.36,23.11 70.61,23.37 CAM2.5
N$51
  Route2 0.254: CAM2.3 70.87,22.1 70.1,21.34 70.1,14.73 68.58,13.21 JP4.16
N$52
  Route2 0.254: CAM2.1 71.37,13.72 68.33,10.67 JP4.17
N$53
  Route2 0.254: CAM2.34 72.64,48.26 75.69,51.31 JP3.17
N$54
  Route2 0.254: CAM2.32 73.15,39.88 74.17,40.89 74.17,48.26 74.68,48.77 JP3.16
N$55
  Route15 0.254: CAM2.30 73.15,38.61 73.91,39.37 73.91,45.72 74.42,46.23 JP3.15
N$56
  Route15 0.254: CAM2.28 73.41,37.34 74.68,38.61 74.68,42.67 75.69,43.69 JP3.14
N$57
  Route2 0.254: CAM2.26 73.15,36.07 75.69,41.15 JP3.13
N$58
  Route15 0.254: CAM2.24 73.41,35.05 76.2,38.35 JP3.12
N$59
  Route15 0.254: CAM2.22 JP3.11
N$60
  Route15 0.254: CAM2.20 JP3.10
N$61
  Route15 0.254: CAM2.18 JP3.9
N$62
  Route15 0.254: CAM2.16 JP3.8
N$63
  Route15 0.254: CAM2.14 JP3.7
N$64
  Route15 0.254: CAM2.12 73.41,26.92 76.2,23.37 JP3.6
N$65
  Route2 0.254: CAM2.10 73.15,25.91 75.69,20.83 JP3.5
N$66
  Route15 0.254: CAM2.8 73.66,24.64 74.68,23.62 74.68,19.05 75.44,18.29 JP3.4
N$67
  Route15 0.254: CAM2.6 73.41,23.37 73.66,23.11 73.66,17.78 75.69,15.75 JP3.3
N$68
  Route2 0.254: CAM2.4 73.15,22.1 73.91,21.34 73.91,14.73 75.44,13.21 JP3.2
N$69
  Route2 0.254: CAM2.2 72.64,13.72 75.69,10.67 JP3.1
N$75
  cutout Top (isolate 0.813): 8.64,22.1 8.89,14.22 23.37,14.22 23.11,22.1
N$76
  pour Top (isolate 0.61): 64.26,55.12 64.26,6.86 79.5,6.86 79.5,55.12
  pour Top (isolate 0.61): 79.5,55.12 79.5,6.86 94.74,6.86 94.74,55.12
N$77
  pour Bottom (isolate 0.61): 65.53,55.12 65.53,6.86 79.5,6.86 79.5,55.12
  pour Bottom (isolate 0.61): 79.5,55.12 79.5,6.86 94.74,6.86 94.74,55.12
P17
  Bottom 0.254: ZED1.H7 36.2,14.61 36.58,14.22 38.86,14.22 39.37,14.73 42.12,14.73 AL422B_2.21
P18
  Bottom 0.254: ZED1.H8 35.94,15.88 38.86,18.8 42.12,18.8 AL422B_2.24
P22  (via drill 0.5)
  Route15 0.254: v32.77,18.54 33.53,18.54 34.8,17.27 34.8,15.24 37.34,12.7 37.34,10.92 39.62,8.64 v40.39,8.64
  Bottom 0.254: ZED1.G10 32.89,18.42 v32.77,18.54 | v40.39,8.64 42.12,8.64 AL422B_2.16
R19  (via drill 0.5)
  Top 0.254: ALA22B_1.26 23.49,30.1 v23.62,29.97
  Route15 0.254: v23.62,29.97 23.62,28.19 26.92,24.89 v27.43,24.89
  Bottom 0.254: ZED1.C14 28.07,23.5 27.43,24.13 v27.43,24.89
R20  (via drill 0.5)
  Top 0.254: ALA22B_1.25 19.94,28.83 v19.81,28.7
  Route15 0.254: v19.81,28.7 21.34,28.7 27.18,22.86 30.23,22.86 v31.5,24.13
  Bottom 0.254: ZED1.D14 30.86,23.5 v31.5,24.13
R21  (via drill 0.5)
  Route2 0.254: CAM1_IN.10 3.56,15.75 4.83,17.02 7.11,17.02 7.11,17.78 13.21,23.88 29.97,23.88 v31.5,25.4
  Bottom 0.254: ZED1.D15 30.86,24.77 v31.5,25.4
SCL(R7)  (via drill 0.5)
  Route2 0.254: CAM1_IN.8 2.03,13.21 1.52,13.72 1.52,46.74 2.79,48.01 13.21,48.01 | CAM2_IN.8 55.63,12.95 44.96,23.62 44.96,41.4 42.67,43.69 v27.43,43.69 23.37,48.01 13.21,48.01 | I2C.1 12.32,43.05 13.21,43.94 13.21,48.01
  Bottom 0.254: v27.43,43.69 28.7,43.69 ZED1.C30
SDA(U7)  (via drill 0.5)
  Route2 0.254: CAM2_IN.6 56.39,10.41 43.69,23.11 43.69,40.64 42.16,42.16 v36.83,42.16
  Route15 0.254: CAM1_IN.6 2.03,10.67 1.52,11.18 1.52,46.74 2.79,48.01 11.18,48.01 | 11.18,48.01 24.89,48.01 v27.69,45.21 29.97,45.21 33.15,42.04 36.7,42.04 v36.83,42.16 | I2C.2 11.18,48.01
  Bottom 0.254: v27.69,45.21 28.7,45.21 ZED1.C31
T16
  Bottom 0.254: ZED1.H13 42,22.23 AL422B_2.27
T17
  Bottom 0.254: ZED1.H14 42,23.5 AL422B_2.28
T19  (via drill 0.5)
  Top 0.254: ALA22B_1.27 23.49,31.37 v23.62,31.24
  Route15 0.254: v27.43,26.16 27.43,28.19 24.38,31.24 v23.62,31.24
  Bottom 0.254: ZED1.C15 28.58,24.77 28.58,25.27 28.19,25.65 27.94,25.65 v27.43,26.16
VADJ
  Bottom 0.254: ZED1.G39 ZED1.H40
WCK1  (via drill 0.5)
  Top 0.254: ALA22B_1.9 8.76,22.48 v8.64,22.61
  Route2 0.254: v8.64,22.61 7.37,23.88 7.37,33.53 v7.62,33.78
  Bottom 0.254: CAM1_IN.27 6.6,38.61 7.37,37.85 7.37,34.04 v7.62,33.78
WCK2  (via drill 0.5)
  Route2 0.254: v56.64,14.48 56.64,35.56 58.17,37.08 59.94,37.08 CAM2_IN.27
  Bottom 0.254: AL422B_2.9 56.01,13.59 v56.64,14.48

## Text on the board
tNames: 3v3 | 3v3 | GND | GND | A22 | B22 | 3v3 | A21 | B21 | GND | B15 | B17 | A17 | C15 | B16 | A16 | SDA(U7) | 12V | A19 | SCL(R7) | GND | A18 | ZedBoard FMC Camera Breakout | Georges Gauthier | John DeCusati | Fall 2016 | 1 | 2 | 1 | 2 | 2 | 1 | 2 | 1 | For LI-VM34LP camera modules & AL422b FIFOs